# EAGLE board buffered mult (EAGLE 7.3.0)

Size 24 x 110 mm. Coordinates in mm from the lower left corner, seen from the top.
Outline: 0,0 24,0 24,110 0,110 0,0
Copper layers (1*16): Top 0.035mm / dielectric 1.5mm / Bottom 0.035mm
Design rules "default": minimum track width 10mil, minimum drill 24mil, track to track 8mil, track to pad 8mil, pad to pad 8mil, via to via 8mil, smd to smd 8mil, copper to edge 40mil, drill to drill 8mil, minimum pad ring 10mil, minimum via ring 8mil, stop-mask expansion 4mil, vias tented up to drill 0mil, thermal gap 10mil

## Footprints (pad centres in the part's own frame; a part is rotated, then mirrored left to right if it is on the bottom)
C0603 = smd 1.1 x 1: 1 -0.85,0; 2 0.85,0
153CLV-0505 = smd 3 x 1.6: + 2.2,0; - -2.2,0
DO41-10 = drill 1.118: A 5.08,0; C -5.08,0
WQP-PJ301M-12_JACK = drill 1.1: P$1_TIP 0,5; P$2_SWITCH 0,-3.5; P$3_SLEEVE 0,-6.5
R0603 = smd 1 x 1.1: 1 -0.85,0; 2 0.85,0
EURO_PWR_HEADER_FAT = drill 1.016 pad 1.88 octagon: 1 -5.08,-1.27; 2 -5.08,1.27; 3 -2.54,-1.27; 4 -2.54,1.27; 5 0,-1.27; 6 0,1.27; 7 2.54,-1.27; 8 2.54,1.27; 9 5.08,-1.27; 10 5.08,1.27
SO14 = smd 0.6 x 2.2: 1 -3.81,-2.6; 2 -2.54,-2.6; 3 -1.27,-2.6; 4 0,-2.6; 5 1.27,-2.6; 6 2.54,-2.6; 7 3.81,-2.6; 8 3.81,2.6; 9 2.54,2.6; 10 1.27,2.6; 11 0,2.6; 12 -1.27,2.6; 13 -2.54,2.6; 14 -3.81,2.6
BOURNS_3362P_TRIMMER = drill 0.813 pad 1.676 octagon: 1 -2.54,0; 2 0,2.54; 3 2.54,0; 4 0,0

## Placement (x,y rotation side)
C1  6pf  [C0603]  2.5,81.42 180 top
C2  10pf  [C0603]  5.46,50.03 0 top
C3  10pf  [C0603]  2.65,9.58 0 top
C4  6pf  [C0603]  2.5,31.42 180 top
C5  10pf  [C0603]  6.5,2 0 top
C6  10pf  [C0603]  12.68,1.92 180 top
C7  0.1uf  [C0603]  15.53,53.1 180 top
C8  0.1uf  [C0603]  15.87,6.8 0 top
C9  10uf  [153CLV-0505]  12.74,100.22 0 top
C10  10uf  [153CLV-0505]  4.88,100.28 180 top
C11  0.1uf  [C0603]  15.83,4.75 180 top
C23  10pf  [C0603]  12.86,50.02 180 top
C24  10pf  [C0603]  2.56,55.53 0 top
C25  0.1uf  [C0603]  15.48,55.5 180 top
D2  1N4004  [DO41-10]  7.71,107.45 0 top
D3  1N4004  [DO41-10]  7.74,104.55 180 top
IN1  THONKICONNNEW  [WQP-PJ301M-12_JACK]  7.25,95 270 bottom
IN2  THONKICONNNEW  [WQP-PJ301M-12_JACK]  7.25,46 270 bottom
OUT1-1  THONKICONNNEW  [WQP-PJ301M-12_JACK]  8.5,84 90 bottom
OUT1-2  THONKICONNNEW  [WQP-PJ301M-12_JACK]  8.5,73 90 bottom
OUT1-3  THONKICONNNEW  [WQP-PJ301M-12_JACK]  8.5,62 90 bottom
OUT2-1  THONKICONNNEW  [WQP-PJ301M-12_JACK]  8.5,35 90 bottom
OUT2-2  THONKICONNNEW  [WQP-PJ301M-12_JACK]  8.5,24 90 bottom
OUT2-3  THONKICONNNEW  [WQP-PJ301M-12_JACK]  8.5,13 90 bottom
R1  49.9k  [R0603]  10.07,67.83 90 top
R2  49.9k  [R0603]  12.32,29.98 90 top
R3  301R  [R0603]  15.98,69.47 90 top
R4  13.3k  [R0603]  16.07,38.48 90 top
R5  49.9k  [R0603]  2.47,52.9 0 top
R6  49.9k  [R0603]  12.41,18.37 90 top
R7  301R  [R0603]  15.98,58.57 90 top
R8  49.9k  [R0603]  12.59,78.48 270 top
R9  49.9k  [R0603]  10.34,78.58 270 top
R10  13.3k  [R0603]  16.01,27.47 90 top
R11  301R  [R0603]  15.97,80.53 270 top
R12  49.9k  [R0603]  10.09,30.03 270 top
R13  49.9k  [R0603]  12.41,67.87 90 top
R14  301R  [R0603]  16.1,31.47 90 top
R15  100k  [R0603]  2,39.77 90 top
R16  107k  [R0603]  4.15,39.77 90 top
R17  107k  [R0603]  4.12,88.14 90 top
R18  13.3k  [R0603]  16.06,76.47 90 top
R19  49.9k  [R0603]  10.16,18.42 90 top
R20  49.9k  [R0603]  2,65.22 90 top
R21  301R  [R0603]  16.05,20.52 90 top
R22  100k  [R0603]  2,88.14 90 top
R23  13.3k  [R0603]  15.98,87.52 90 top
R24  13.3k  [R0603]  15.93,65.47 90 top
R25  49.9k  [R0603]  2.67,7.35 0 top
R26  49.9k  [R0603]  2,15.82 90 top
R27  301R  [R0603]  16.1,9.53 270 top
R28  13.3k  [R0603]  16.03,16.52 90 top
SV1  EURO_POWER_HEADERFAT_PADS  [EURO_PWR_HEADER_FAT]  19.73,100.69 90 top
U1  TL074_SMD  [SO14]  9.11,55.22 180 top
U2  TL074_SMD  [SO14]  9.31,6.97 180 top
VR1  2k  [BOURNS_3362P_TRIMMER]  19.5,84 0 bottom
VR2  2k  [BOURNS_3362P_TRIMMER]  19.5,73 0 bottom
VR3  2k  [BOURNS_3362P_TRIMMER]  19.5,62 0 bottom
VR4  2k  [BOURNS_3362P_TRIMMER]  19.5,35 0 bottom
VR5  2k  [BOURNS_3362P_TRIMMER]  19.5,24 0 bottom
VR6  2k  [BOURNS_3362P_TRIMMER]  19.5,13 0 bottom

## Library data of the parts
C1-C11 C23-C25 R1-R28 = resistor
D2 D3 = diode
IN1 IN2 OUT1-1-OUT1-3 OUT2-1-OUT2-3 SV1 U1 U2 VR1-VR6 = MusicThingModular

## Nets
GND: C7.1 C8.2 C9.- C10.+ C11.1 C25.2 D2.A D3.C IN1.P$3_SLEEVE IN2.P$3_SLEEVE OUT1-1.P$3_SLEEVE OUT1-2.P$3_SLEEVE OUT1-3.P$3_SLEEVE OUT2-1.P$3_SLEEVE OUT2-2.P$3_SLEEVE OUT2-3.P$3_SLEEVE R4.2 R10.2 R18.2 R23.2 R24.2 R28.2 SV1.3 SV1.4 SV1.5 SV1.6 SV1.7 SV1.8 U1.3 U1.5 U1.10 U1.12 U2.3 U2.5 U2.10 U2.12
N$1: IN1.P$1_TIP R22.2
N$2: C4.1 R16.2 U2.1 VR2.3 VR3.3 VR6.3
N$3: C1.2 R17.1 R22.1 U1.2
N$4: C4.2 R15.1 R16.1 U2.2
N$5: R18.1 VR2.1
N$6: R23.1 VR1.1
N$7: C1.1 R17.2 U1.1 VR1.3 VR4.3 VR5.3
N$8: R13.2 VR2.2 VR2.4
N$9: R9.2 VR1.2 VR1.4
N$10: C24.2 R8.1 R9.1 U1.6
N$11: C3.2 R12.1 R13.1 U2.6
N$12: C24.1 R11.1 U1.7
N$13: OUT1-1.P$1_TIP R8.2 R11.2
N$14: C3.1 R14.1 U2.7
N$15: R4.1 VR4.1
N$16: OUT2-1.P$1_TIP R12.2 R14.2
N$17: R24.1 VR3.1
N$18: R20.2 VR3.2 VR3.4
N$19: R2.2 VR4.2 VR4.4
N$20: C2.2 R1.1 R2.1 U1.9
N$21: C2.1 R3.1 U1.8
N$23: C5.2 R19.1 R20.1 U2.9
N$24: C5.1 R21.1 U2.8
N$25: OUT1-2.P$1_TIP R1.2 R3.2
N$26: OUT2-2.P$1_TIP R19.2 R21.2
N$27: R28.1 VR6.1
N$28: R26.2 VR6.2 VR6.4
N$29: C6.2 R25.1 R26.1 U2.13
N$30: C6.1 R27.1 U2.14
N$31: OUT2-3.P$1_TIP R25.2 R27.2
N$41: R10.1 VR5.1
N$42: R6.2 VR5.2 VR5.4
N$43: C23.2 R5.1 R6.1 U1.13
PWR+12V: C8.1 C9.+ C25.1 D2.C SV1.9 SV1.10 U1.4 U2.4
PWR-12V: C7.2 C10.- C11.2 D3.A SV1.1 SV1.2 U1.11 U2.11
TO-IN2: C23.1 IN2.P$2_SWITCH OUT1-3.P$1_TIP R5.2 R7.1 R7.2 U1.14
TO-IN3: IN2.P$1_TIP R15.2

## Tracks (layer width: path | path; a pad name or v marks a point on that pad's centre or on a via)
GND  (35 unrouted)
N$1  (1 unrouted)
N$2  (5 unrouted)
N$3  (3 unrouted)
N$4  (3 unrouted)
N$5  (1 unrouted)
N$6  (1 unrouted)
N$7  (5 unrouted)
N$8  (2 unrouted)
N$9  (2 unrouted)
N$10  (3 unrouted)
N$11  (3 unrouted)
N$12  (2 unrouted)
N$13  (2 unrouted)
N$14  (2 unrouted)
N$15  (1 unrouted)
N$16  (2 unrouted)
N$17  (1 unrouted)
N$18  (2 unrouted)
N$19  (2 unrouted)
N$20  (3 unrouted)
N$21  (2 unrouted)
N$23  (3 unrouted)
N$24  (2 unrouted)
N$25  (2 unrouted)
N$26  (2 unrouted)
N$27  (1 unrouted)
N$28  (2 unrouted)
N$29  (3 unrouted)
N$30  (2 unrouted)
N$31  (2 unrouted)
N$41  (1 unrouted)
N$42  (2 unrouted)
N$43  (3 unrouted)
PWR+12V  (7 unrouted)
PWR-12V  (7 unrouted)
TO-IN2  (6 unrouted)
TO-IN3  (1 unrouted)